# Altium PCB Sensor.PcbDoc
Units mil, origin at the board's own origin, x right, y up, seen from the top; angles counter-clockwise.
Board outline 1017.81 x 5829.89 mil, 4 copper layers (Top Layer, Signal Layer 1, Signal Layer 2, Bottom Layer), stack 30.635 mil thick; 75 components, 81 nets, 286 pads, 106 vias.
Unrouted connection lines stored in the file: 52.
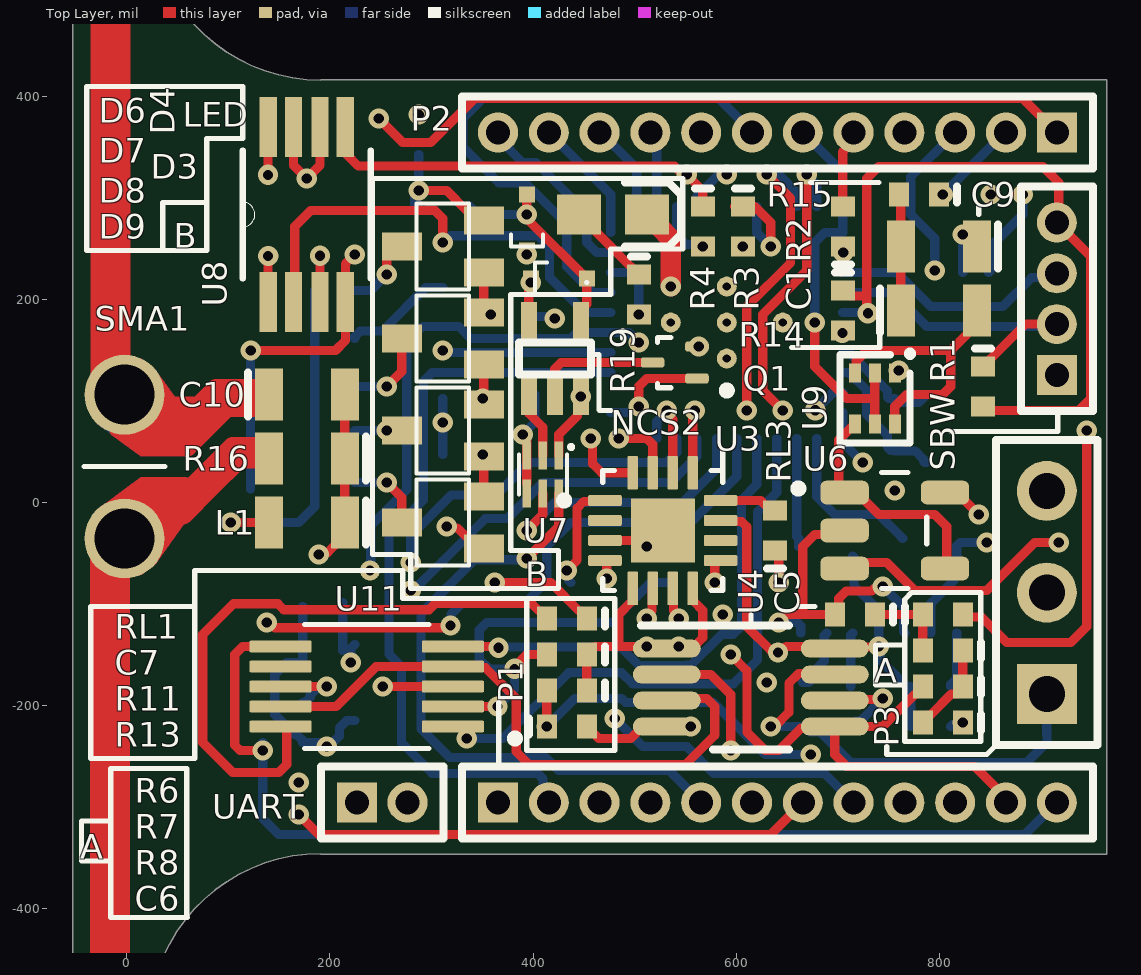
[diagram p0: Top Layer view]
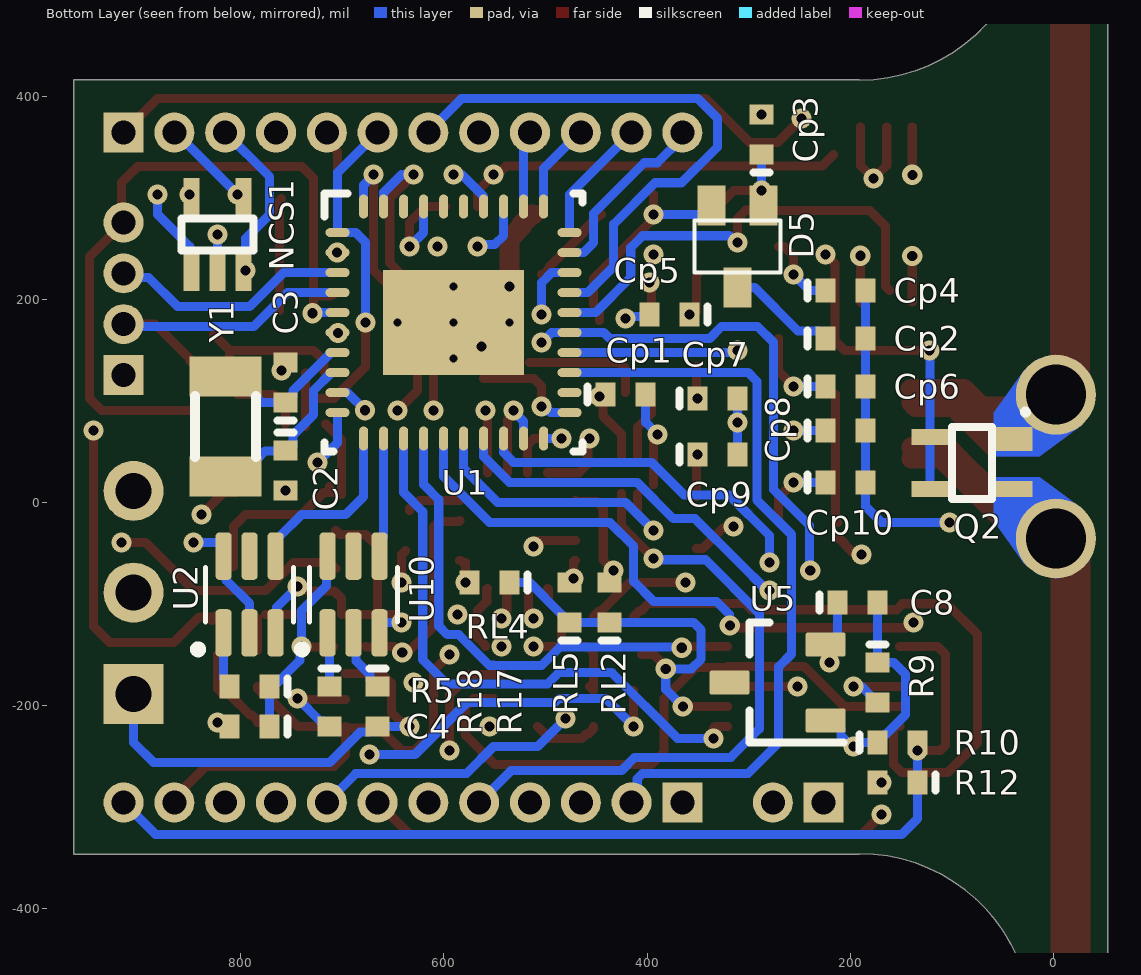
[diagram p1: Bottom Layer view, seen from below]
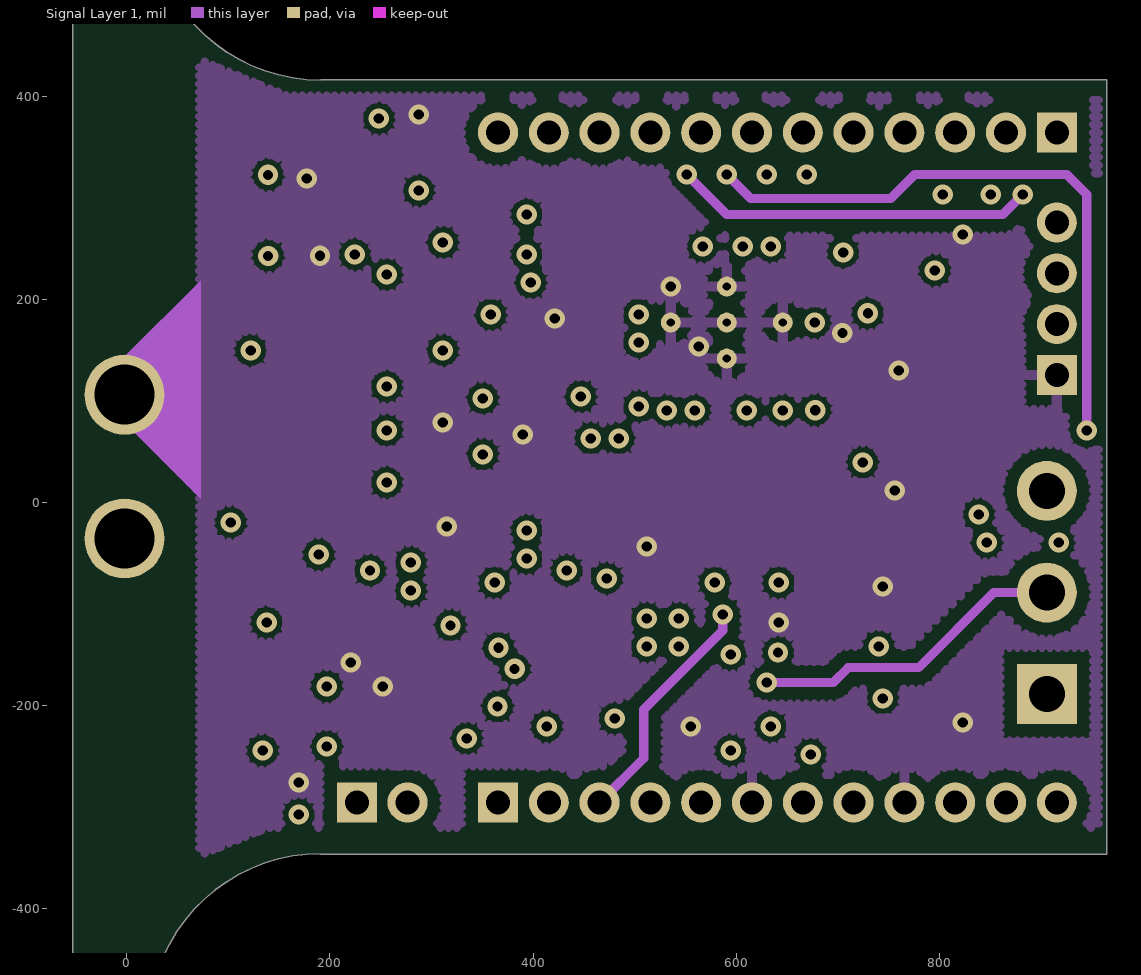
[diagram p2: Signal Layer 1]
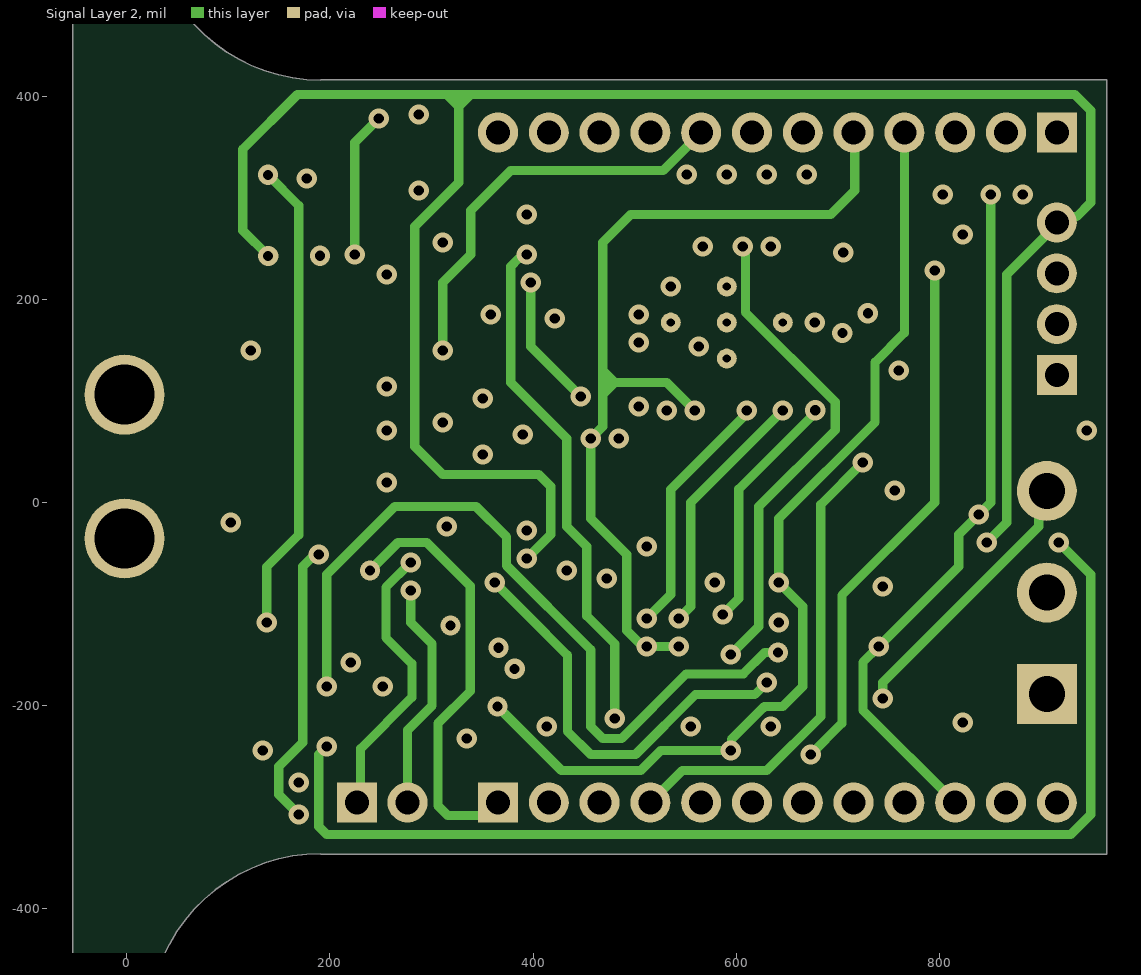
[diagram p3: Signal Layer 2]

## Layer stack, top to bottom
Top Solder: solder mask 0.4, Solder Resist, Dk 3.5
Top Layer: signal copper 1.4
Dielectric 1: core 10, FR-4, Dk 4.2
Signal Layer 1: signal copper 1.4173
Dielectric 3: prepreg 5, Dk 4.2
Signal Layer 2: signal copper 1.4173
Dielectric 2: core 10, Dk 4.2
Bottom Layer: signal copper 1.4
Bottom Solder: solder mask 0.4, Solder Resist, Dk 3.5

## Board outline
-53.24,-2839.94 -53.24,2910.06 cw(c-15.74,2912.56) 21.76,2910.06 21.76,585.06 ccw(c191.05,585.06) 191.05,415.77 191.05,416.06 964.57,416.06 964.57,-345.94 191.05,-345.94 191.05,-345.58 ccw(c191.05,-514.87) 21.76,-514.87 21.76,-2839.94 cw(c-15.74,-2842.44)

## Design rules (kind name [scope] priority, off if disabled: settings)
Clearance [All] p1: gap=4 ignorepadtopadclearanceinfootprint=FALSE except(5: Via-Fill Via-Poly Via-Region; 12: Arc-Fill Arc-Poly Arc-Region Track-Fill Track-Poly Track-Region SMDPad-Fill SMDPad-Poly SMDPad-Region THPad-Fill THPad-Poly THPad-Region Fill-Fill Fill-Poly Fill-Region Poly-Poly Poly-Region Region-Region)
PlaneClearance [All] p1: clearance=10
PlaneConnect [All] p1: planeconnectstyle=Direct reliefexpansion=20 reliefentries=4 reliefconductorwidth=10 reliefairgap=10
PolygonConnect [All] p1: thpad.connectstyle=Relief thpad.reliefconductorwidth=10 thpad.reliefentries=4 thpad.polygonreliefangle="90 Angle" thpad.airgapwidth=10 smdpad.connectstyle=Relief smdpad.reliefconductorwidth=10 smdpad.reliefentries=4 smdpad.polygonreliefangle="90 Angle" smdpad.airgapwidth=10 via.connectstyle=Direct via.reliefconductorwidth=10 via.reliefentries=4 via.polygonreliefangle="90 Angle" via.airgapwidth=10
RoomDefinition SS [InComponentClass('SS')] p1: confinementstyle=ConfineIn formatcopy=TRUE lockcomponents=FALSE outline -10547.24,-6763.94 -8547.24,-6763.94 -8547.24,-5763.94 -10547.24,-5763.94
RoomDefinition AFE [InComponentClass('AFE')] p2: confinementstyle=ConfineIn formatcopy=TRUE lockcomponents=FALSE outline -10547.24,-6763.94 -8547.24,-6763.94 -8547.24,-5763.94 -10547.24,-5763.94
RoutingVias [All] p1: holewidth=10 width=20 viastyle="Through Hole" minholewidth=10 minwidth=20 maxholewidth=10 maxwidth=20
SolderMaskExpansion [All] p1: expansion=4 istentingtop=FALSE
UnRoutedNet [All] p1: checkbadconnections=TRUE
Width [All] p1: maxlimit=1000 minlimit=9 preferedwidth=9
27 further rules are at their usual default settings.

## Classes and differential pairs
net class POWER: GND V1.25 VCC VREF+ VSENSOR
component class AFE: C10 Cp1 Cp2 Cp3 Cp4 Cp5 Cp6 Cp7 Cp8 Cp9 Cp10 D3 D4 D5 D6 D7 D8 D9 L1 NCS2 Q1 Q2 R16 SMA1 U7 U8
component class MCU: C1 C2 C3 LED P1 P2 R1 R2 R3 R4 R19 SBW U1 UART Y1
component class SS: C4 C5 C6 C7 C8 C9 NCS1 P3 R5 R6 R7 R8 R9 R10 R11 R12 R13 R14 R15 R17 R18 RL1 RL2 RL3 RL4 RL5 U2 U3 U4 U5 U6 U9 U10 U11

## Components (designator, comment, footprint, x,y, rotation, side; value= is the part's Value field where it differs from the comment)
C1 "" 0402 704.72,188.98 r270 top value=1uF
C2 "" 0402 755.91,31.5 r270 bottom value=12pF
C3 "" 0402 755.91,118.11 r90 bottom value=12pF
C4 "" 0402 791.34,-220.47 r0 bottom value=1uF
C5 "" 0402 716.54,-110.24 r180 top value=0.1uF
C6 "" 0402 803.15,-216.54 r180 top value=0.1uF
C7 "" 0402 433.07,-149.61 r180 top value=10uF
C8 "" 0402 192.91,-98.43 r180 bottom value=1uF
C9 "" 0805 799.21,251.97 r180 top value=1pF
C10 "" 0805 177.17,106.3 r0 top value=2.2pF
Cp1 "" 0402 421.26,106.3 r180 bottom value=0.1uF
Cp2 "" 0402 204.72,161.42 r180 bottom value=7pF
Cp3 "" 0402 287.4,362.2 r90 bottom value=10pF
Cp4 "" 0402 204.72,208.66 r180 bottom value=7pF
Cp5 "" 0402 377.95,185.04 r0 bottom value=10pF
Cp6 "" 0402 204.72,114.17 r180 bottom value=7pF
Cp7 "" 0402 330.71,102.36 r180 bottom value=10pF
Cp8 "" 0402 204.72,70.87 r180 bottom value=7pF
Cp9 "" 0402 330.71,47.24 r180 bottom value=10pF
Cp10 "" 0402 204.72,19.69 r180 bottom value=7pF
D3 "RB751S40T1" SOD-523 425.2,220.47 r90 top
D4 "RB751S40T1" SOD-523 393.7,275.59 r180 top
D5 "HSMS-285C" "SOT-323, HSMS-285C" 311.02,251.97 r0 bottom
D6 "HSMS-285C" "SOT-323, HSMS-285C" 311.02,251.97 r90 top
D7 "HSMS-285C" "SOT-323, HSMS-285C" 311.02,161.42 r90 top
D8 "HSMS-285C" "SOT-323, HSMS-285C" 311.02,70.87 r90 top
D9 "HSMS-285C" "SOT-323, HSMS-285C" 311.02,-19.69 r90 top
L1 "" 0805 177.17,-19.69 r180 top value=22nH
LED "RED LED" "Diode - 0603" 478.35,283.46 r180 top
NCS1 "NCS2200" SC70-5 822.83,263.78 r180 bottom
NCS2 "NCS2200" SC70-5 421.26,141.73 r0 top
P1 "不插排母，只留焊孔" MHDR1X12 365.35,-295.28 r0 top locked
P2 "不插排母，只留焊孔" MHDR1X12 915.35,364.17 r180 top locked
P3 "宽距90°特殊弯排母" HDR1X3 905.51,-188.58 r90 top locked
Q1 "NTK3134Ｎ" SOT40P120X55-3N 539.37,137.8 r180 top
Q2 "BF1101WR" SOT343R 78.74,39.37 r90 bottom
R1 "" 0402 842.52,114.17 r270 top value=47k
R2 "" 0402 704.72,271.65 r90 top value=0
R3 "" 0402 606.3,271.65 r270 top value=0
R4 "" 0402 566.93,271.65 r270 top value=0
R5 "" 0402 791.34,-181.1 r0 bottom value=0
R6 "" 0402 803.15,-110.24 r0 top value=1M
R7 "" 0402 803.15,-145.67 r180 top value=1M
R8 "" 0402 803.15,-181.1 r180 top value=0
R9 "" 0402 173.23,-177.17 r270 bottom value=510k
R10 "" 0402 153.54,-236.22 r180 bottom value=50k
R11 "" 0402 433.07,-185.04 r180 top value=1M
R12 "" 0402 153.54,-275.59 r0 bottom value=1.2M
R13 "" 0402 433.07,-220.47 r0 top value=1M
R14 "" 0805 799.21,188.98 r0 top value=300k
R15 "" 0402 779.53,303.15 r180 top value=0
R16 "" 0805 177.17,43.31 r180 top value=0
R17 "" 0402 665.35,-200.79 r270 bottom value=0
R18 "" 0402 712.6,-200.79 r270 bottom value=0
R19 "" 0402 503.94,204.72 r270 top value=100
RL1 "RT0402BRD0710RL" 0402 433.07,-114.17 r180 top value=10.0
RL2 "RT0402BRD07240RL" 0402 437.01,-98.43 r90 bottom value=10.0
RL3 "RT0402BRD072KL" 0402 637.8,-27.56 r90 top value=10.0
RL4 "RT0402BRD076K7L" 0402 555.12,-78.74 r0 bottom value=10.0
RL5 "RT0402BRD0748KL" 0402 476.38,-98.43 r90 bottom value=10.0
SBW "90°弯排母" MHDR1X4 915.35,125.59 r90 top locked
SMA1 "" "SMA - Hole - 2 Pin" -2.24,35.39 r180 top
U1 "MSP430FR2355TRHAR" MSP430FR2355TRHA_RHA0040E 590.55,177.17 r180 bottom
U2 "ADG841YKSZ-REEL7" SOT65P210X110-6N 791.34,-90.55 r90 bottom
U3 "ADG811YCPZ-REEL" QFN50P300X300X90-17N 527.56,-27.56 r0 top
U4 "LPV802DGKR" DGK0008A_N 614.17,-182.09 r0 top
U5 "REF1112AIDBZR" DBZ0003A_N 271.65,-177.17 r0 bottom
U6 "OPA313" SOT95P280X145-5N 755.91,-27.56 r0 top
U7 "NLSV1T244" UDFN6 409.45,27.56 r180 top
U8 "ADG918BRMZ" SOP65P490X110-8N 177.17,283.46 r90 top
U9 "SI1016X-T1-GE3" "SC-89-6 Vishay" 736.22,102.36 r270 top
U10 "ADG841YKSZ-REEL7" SOT65P210X110-6N 688.98,-90.55 r90 bottom
U11 "ADG811YRUZ" SOP50P490X110-10N 236.22,-181.1 r180 top
UART "MHDR1X2" MHDR1X2 226.38,-295.28 r0 top locked
Y1 "XTAL" "XTAL [3.20mm x 1.50mm]" 814.96,74.8 r270 bottom value=32.768kHz

## Footprints (in the part's own frame and the unit in brackets; to place one, negate y for a bottom-side part, rotate by r counter-clockwise, add the part's x,y. Pads: shape width x height; smd on the part's side, far side on the other; paste and mask are expansions set on the pad)
0402 [mm] "Surface Mount; Body 1 x 0.5 mm (LxW typ)"
  rect 0.5x0.6 smd: 1(-0.5,0) 2(0.5,0)
  silkscreen extent -0.95,-0.2 -0.95,0.2, body extent -0.5,-0.25 0.5,0.25, height 0.5
0805 [mm] "Surface Mount; Body 2.0 x 1.25 mm (LxW typ)"
  rect 0.7x1.3 smd: 1(-0.95,0) 2(0.95,0)
  silkscreen extent -1.48,-0.55 -1.48,0.55, body extent -1,-0.62 1,0.63, height 1.25
DBZ0003A_N [mm] "SOT23, 3-Leads, Body 2.9x1.3mm, Pitch 0.95mm, Lead Span 2.4mm, IPC Medium Density"
  rrect17% 1x0.6 smd: 1(-1.2,0.95) 2(-1.2,-0.95) 3(1.2,0)
  silkscreen extent -1.65,-1.5 0.7,1.5, body extent -1.26,-1.46 1.26,1.46, height 0.98
DGK0008A_N [mm] "TSOP, 8-Leads, Body 3x3mm, Pitch 0.65mm, IPC Medium Density"
  oval 1.7x0.45 smd: 1(-2.1,0.975) 2(-2.1,0.325) 3(-2.1,-0.325) 4(-2.1,-0.975) 5(2.1,-0.975) 6(2.1,-0.325) 7(2.1,0.325) 8(2.1,0.975)
  silkscreen extent -2.75,-1.55 0.95,1.55, body extent -2.45,-1.5 2.45,1.5, height 0.94
"Diode - 0603" [mm] "Diode: Body 1.6 x 0.8 mm (LxW typ)"
  rect 1.1x1 smd: 1(0.85,0) 2(-0.85,0)
  silkscreen extent -1.7,-0.8 -0.3,0.8
HDR1X3 [mm] "Connector; Header; 3 Position"
  rect 1.5x1.5 hole 0.9: 1(0,0)
  round 1.5 hole 0.9: 2(2.54,0) 3(5.08,0)
  silkscreen extent -1.27,-1.27 6.35,1.27, body extent -1.27,-1.27 6.35,1.27, height 10.1
MHDR1X2 [mm] "Connector; Header; 2 Position"
  rect 1x1 hole 0.6: 1(0,0)
  round 1 hole 0.6: 2(1.27,0)
  silkscreen extent -0.9,-0.9 2.17,0.9
MHDR1X4 [mm] "Connector; Header; 4 Position"
  rect 1x1 hole 0.6: 1(0,0)
  round 1 hole 0.6: 2(1.27,0) 3(2.54,0) 4(3.81,0)
  silkscreen extent -0.9,-0.9 4.71,0.9, body extent -1.27,-1.27 5.08,1.27, height 10.15
MHDR1X12 [mm] "Connector; Header; 12 Position"
  rect 1x1 hole 0.6: 1(0,0)
  round 1 hole 0.6: 2(1.27,0) 3(2.54,0) 4(3.81,0) 5(5.08,0) 6(6.35,0) 7(7.62,0) 8(8.89,0) 9(10.16,0) 10(11.43,0) 11(12.7,0) 12(13.97,0)
  silkscreen extent -0.9,-0.9 14.87,0.9, body extent -1.27,-1.27 15.24,1.27, height 10.15
MSP430FR2355TRHA_RHA0040E [mm]
  oval 0.6x0.23 smd paste+0 mask+0.076: 1(-2.9,2.25) 2(-2.9,1.75) 3(-2.9,1.25) 4(-2.9,0.75) 5(-2.9,0.25) 6(-2.9,-0.25) 7(-2.9,-0.75) 8(-2.9,-1.25) 9(-2.9,-1.75) 10(-2.9,-2.25) 21(2.9,-2.25) 22(2.9,-1.75) 23(2.9,-1.25) 24(2.9,-0.75) 25(2.9,-0.25) 26(2.9,0.25) 27(2.9,0.75) 28(2.9,1.25) 29(2.9,1.75) 30(2.9,2.25)
  oval 0.23x0.6 smd paste+0 mask+0.076: 11(-2.25,-2.9) 12(-1.75,-2.9) 13(-1.25,-2.9) 14(-0.75,-2.9) 15(-0.25,-2.9) 16(0.25,-2.9) 17(0.75,-2.9) 18(1.25,-2.9) 19(1.75,-2.9) 20(2.25,-2.9) 31(2.25,2.9) 32(1.75,2.9) 33(1.25,2.9) 34(0.75,2.9) 35(0.25,2.9) 36(-0.25,2.9) 37(-0.75,2.9) 38(-1.25,2.9) 39(-1.75,2.9) 40(-2.25,2.9)
  rect 3.52x2.62 smd paste-1.747 mask+0: 41(0,0)
  round 0.5 hole 0.203 mask+0: V(-1.4,0) V(0,-0.9) V(0,0) V(0,0.9) V(1.4,0)
  silkscreen extent -3.22,-3.22 3.22,3.22, body extent 0,0 0.25,0.25, height 0.25
QFN50P300X300X90-17N [mm]
  rrect25% 0.84x0.27 smd mask+0: 1(-1.445,0.75) 2(-1.445,0.25) 3(-1.445,-0.25) 4(-1.445,-0.75) 9(1.445,-0.75) 10(1.445,-0.25) 11(1.445,0.25) 12(1.445,0.75)
  rrect25% 0.27x0.84 smd mask+0: 5(-0.75,-1.445) 6(-0.25,-1.445) 7(0.25,-1.445) 8(0.75,-1.445) 13(0.75,1.445) 14(0.25,1.445) 15(-0.25,1.445) 16(-0.75,1.445)
  rect 1.6x1.6 smd paste-0.294 mask+0.05: 17(0,0)
  silkscreen extent -2.56,-1.5 1.5,1.5
SC70-5 [mm] "SC70-5"
  rect 0.4x0.92 smd: 1(-0.65,-0.95) 2(0,-0.95) 3(0.65,-0.95) 4(0.65,0.95) 5(-0.65,0.95)
  silkscreen extent -0.9,-0.4 0.9,0.4
"SC-89-6 Vishay" [mm]
  rect 0.478x0.3 smd: 1(-0.638,0.5) 2(-0.638,0) 3(-0.638,-0.5) 4(0.638,-0.5) 5(0.638,0) 6(0.638,0.5)
  silkscreen extent -1.15,-0.87 1.11,0.91
"SMA - Hole - 2 Pin" [mm] "SMA port for wisp"
  round 2 hole 1.5: 1(0,1.796) 2(0,-1.796)
  silkscreen extent -1.02,0 1.02,0
SOD-523 [mm] "SOD-523 Footprint"
  rect 0.4x0.4 smd: 1(0,0.7) 2(0,-0.7)
  silkscreen extent -0.4,0.3 0.4,0.6, body extent -0.4,-0.6 0.4,0.6, height 1
SOP50P490X110-10N [mm]
  rrect25% 1.55x0.3 smd: 1(-2.155,1) 2(-2.155,0.5) 3(-2.155,0) 4(-2.155,-0.5) 5(-2.155,-1) 6(2.155,-1) 7(2.155,-0.5) 8(2.155,0) 9(2.155,0.5) 10(2.155,1)
  silkscreen extent -3.8,-1.55 1.55,1.55
SOP65P490X110-8N [mil]
  rect 59x17 smd: 1(-86,38) 2(-86,13) 3(-86,-13) 4(-86,-38) 5(86,-38) 6(86,-13) 7(86,13) 8(86,38)
  silkscreen extent -63,-63 63,63
SOT40P120X55-3N [mm]
  rrect50% 0.59x0.25 smd: 1(-0.555,0.4) 2(-0.555,-0.4) 3(0.555,0)
  silkscreen extent -1.4,-0.63 0.43,0.8, body extent -0.6,-0.6 0.6,0.6, height 0.55
SOT65P210X110-6N [mm]
  rrect50% 1.19x0.4 smd: 1(-0.96,0.65) 2(-0.96,0) 3(-0.96,-0.65) 4(0.96,-0.65) 5(0.96,0) 6(0.96,0.65)
  silkscreen extent -1.47,-1.1 0.68,1.39
SOT95P280X145-5N [mm]
  rrect50% 1.21x0.59 smd: 1(-1.255,0.95) 2(-1.255,0) 3(-1.255,-0.95) 4(1.255,-0.95) 5(1.255,0.95)
  silkscreen extent -2.51,-1.45 0.8,1.45
SOT343R [mm] "SOT343R - Package for BF1101WR"
  rect 0.6x0.92 smd: 1(0.584,-1.016)
  rect 0.4x0.92 smd: 2(-0.664,-1.007) 3(-0.664,1.093) 3(0.636,1.093)
  silkscreen extent -0.91,-1.3 1.27,0.54
"SOT-323, HSMS-285C" [mm] "SOT-323/SC-70; 3 Leads; HSMS-285C"
  rect 0.7x1 smd: 1(-0.65,-1.025) 2(0.65,-1.025) 3(0,1.025)
  silkscreen extent -1.07,-0.65 1.07,0.65, body extent -1.07,-0.65 1.07,0.65, height 1
UDFN6 [mm] "UDFN6 - Level Shifter -  NLSV1T244"
  rect 0.22x0.7 smd: 1(-0.4,-0.477) 2(0,-0.477) 3(0.4,-0.477) 4(0.4,0.477) 5(0,0.477) 6(-0.4,0.477)
  silkscreen extent -0.76,-0.74 0.6,0.5
"XTAL [3.20mm x 1.50mm]" [mm] "FC-135   crystal - epson eletronics"
  rect 1x1.8 smd: 1(-1.25,0) 2(1.25,0)
  silkscreen extent -0.76,-0.76 0.76,0.76

## Part data
C1 C2 C3 C4 C5 C6 C7 C8 C9: library part Cap, "Ceramic Capacitor (Surface Mount)", Manufacturer="Generic Ceramic Chip Cap (TBD)"
C10: library part Cap, "Ceramic Capacitor (Surface Mount)", Digi-Key Part Number=712-1289-1-ND, Manufacturer=Johanson, Manufacturer Part Number=500R07S5R6CV4T
Cp1 Cp2 Cp3 Cp4 Cp5 Cp6 Cp7 Cp8 Cp9 Cp10: library part Cap, "Ceramic Capacitor (Surface Mount)", Digi-Key Part Number=712-1253-1-ND, Manufacturer=Johanson, Manufacturer Part Number=500R07S100JV4T
D3 D4: "Schottky Diode", Code_JEDEC=DO-214-AA, LatestRevisionDate=17-Jul-2002, LatestRevisionNote="Re-released for DXP Platform.", PackageReference=SMB, Published=8-Jun-2000, Publisher="Altium Limited"
D5 D6 D7 D8 D9: "Agilent Schottky Diode, Two in Series, Small Package SOT-323", Digi-Key Part Number=516-2558-ND, Manufacturer="Avago Technologies US Inc.", Manufacturer Part Number=HSMS-285C-BLKG
L1: library part Ind, "Inductor (Surface Mount)", Digi-Key Part Number=N/A, Manufacturer="Coilcraft (http://www.coilcraft.com/0402cs.cfm)", Manufacturer Part Number=0402CS-16NX_LU
LED: library part "Diode - LED", "Typical RED, GREEN, YELLOW, AMBER GaAs LED"
NCS1 NCS2: "Comparator: On Semi 10uA Comparator", Digi-Key Part Number=NCS2200SQ2T2GOSTR-ND, Manufacturer="ON Semiconductor", Manufacturer Part Number=NCS2200SQ2T2G
P1 P2: library part MHDR1X12, "Header, 12-Pin", LatestRevisionDate=17-Jul-2002, LatestRevisionNote="Re-released for DXP Platform.", Publisher="Altium Limited"
P3: library part "Header 3", "Header, 3-Pin", LatestRevisionDate=17-Jul-2002, LatestRevisionNote="Re-released for DXP Platform.", Publisher="Altium Limited"
Q2: "N-Channel Dual-Gate Mos-Fets MOSFET, SOT343R", Digi-Key Part Number=568-6140-1-ND, Manufacturer="NXP Semiconductors", Manufacturer Part Number=BF1101WR,115
R1 R2 R3 R4 R16 R19: library part Res, "Chip Resistor (Surface Mount)", Digi-Key Part Number=P47.0KLCT-ND, Manufacturer=Panasonic, Manufacturer Part Number=ERJ-2RKF4702X
R5 R6 R7 R8 R9 R10 R11 R12 R13 R14 R15 R17 R18: library part Res, "Chip Resistor (Surface Mount)", Manufacturer="Generic Chip Res (TBD)"
RL1: "RES, 10.0, 0.1%, 0.1 W, 0402", Manufacturer="Yageo America", PartNumber=RT0603BRD0710RL, Power_W=0.1, TempCo="25 ppm/C", Value1=0.1%, Value2=0.1W, Value_Code=10R0, ValueDisplayed=10.0, AEC Category=Q200, AEC Qualified=?, ComponentLink1Description="Datasheet link", ComponentLink1URL=http://www.yageo.com/pdf/PYu-RT_1-to-0.05_RoHS_L_3.pdf, CompType=Resistor, EIA_Code=E192, LatestRevisionDate=2016-06-02, MountType=SMT, PackageReference=0603, Published=2008-06-26, Publisher="Texas Instruments", Res_ohm=10, RoHS=Y, SizeArea_mm2=1.28, SizeX_mm=1.6, SizeY_mm=0.8, SizeZ_mm=1, SymbolVersion=2009-05-29, Technology="Thin Film", Tolerance_%=0.1, U/M=EA, VDC_V=75
RL2: "RES, 240, 0.1%, 0.1 W, 0402", Manufacturer="Yageo America", PartNumber=RT0603BRD0710RL, Power_W=0.1, TempCo="25 ppm/C", Value1=0.1%, Value2=0.1W, Value_Code=10R0, ValueDisplayed=240, AEC Category=Q200, AEC Qualified=?, ComponentLink1Description="Datasheet link", ComponentLink1URL=http://www.yageo.com/pdf/PYu-RT_1-to-0.05_RoHS_L_3.pdf, CompType=Resistor, EIA_Code=E192, LatestRevisionDate=2016-06-02, MountType=SMT, PackageReference=0603, Published=2008-06-26, Publisher="Texas Instruments", Res_ohm=10, RoHS=Y, SizeArea_mm2=1.28, SizeX_mm=1.6, SizeY_mm=0.8, SizeZ_mm=1, SymbolVersion=2009-05-29, Technology="Thin Film", Tolerance_%=0.1, U/M=EA, VDC_V=75
RL3: "RES, 2k, 0.1%, 0.1 W, 0402", Manufacturer="Yageo America", PartNumber=RT0603BRD0710RL, Power_W=0.1, TempCo="25 ppm/C", Value1=0.1%, Value2=0.1W, Value_Code=10R0, ValueDisplayed=2k, AEC Category=Q200, AEC Qualified=?, ComponentLink1Description="Datasheet link", ComponentLink1URL=http://www.yageo.com/pdf/PYu-RT_1-to-0.05_RoHS_L_3.pdf, CompType=Resistor, EIA_Code=E192, LatestRevisionDate=2016-06-02, MountType=SMT, PackageReference=0603, Published=2008-06-26, Publisher="Texas Instruments", Res_ohm=10, RoHS=Y, SizeArea_mm2=1.28, SizeX_mm=1.6, SizeY_mm=0.8, SizeZ_mm=1, SymbolVersion=2009-05-29, Technology="Thin Film", Tolerance_%=0.1, U/M=EA, VDC_V=75
RL4: "RES, 6.7, 0.1%, 0.1 W, 0402", Manufacturer="Yageo America", PartNumber=RT0603BRD0710RL, Power_W=0.1, TempCo="25 ppm/C", Value1=0.1%, Value2=0.1W, Value_Code=10R0, ValueDisplayed=6.7k, AEC Category=Q200, AEC Qualified=?, ComponentLink1Description="Datasheet link", ComponentLink1URL=http://www.yageo.com/pdf/PYu-RT_1-to-0.05_RoHS_L_3.pdf, CompType=Resistor, EIA_Code=E192, LatestRevisionDate=2016-06-02, MountType=SMT, PackageReference=0603, Published=2008-06-26, Publisher="Texas Instruments", Res_ohm=10, RoHS=Y, SizeArea_mm2=1.28, SizeX_mm=1.6, SizeY_mm=0.8, SizeZ_mm=1, SymbolVersion=2009-05-29, Technology="Thin Film", Tolerance_%=0.1, U/M=EA, VDC_V=75
RL5: "RES, 48k, 0.1%, 0.1 W, 0402", Manufacturer="Yageo America", PartNumber=RT0603BRD0710RL, Power_W=0.1, TempCo="25 ppm/C", Value1=0.1%, Value2=0.1W, Value_Code=10R0, ValueDisplayed=48k, AEC Category=Q200, AEC Qualified=?, ComponentLink1Description="Datasheet link", ComponentLink1URL=http://www.yageo.com/pdf/PYu-RT_1-to-0.05_RoHS_L_3.pdf, CompType=Resistor, EIA_Code=E192, LatestRevisionDate=2016-06-02, MountType=SMT, PackageReference=0603, Published=2008-06-26, Publisher="Texas Instruments", Res_ohm=10, RoHS=Y, SizeArea_mm2=1.28, SizeX_mm=1.6, SizeY_mm=0.8, SizeZ_mm=1, SymbolVersion=2009-05-29, Technology="Thin Film", Tolerance_%=0.1, U/M=EA, VDC_V=75
SBW: library part MHDR1X4, "Header, 4-Pin", Digi-Key Part Number=ED90474-ND, Manufacturer="Mill-Max Manufacturing", Manufacturer Part Number=851-43-004-20-001000
SMA1: library part "SMA - Hole - 2 Pin", "Two pin SMA connector wisp", DNP=DNP, Note="This part is used to attach the antennae to WISP in the layout"
U1: "24MHz 105C integrated analog microcontroller with 32KB FRAM, Op-Amps/PGAs, 12-bit DACs, 12-bit ADC", Mfr_Name="Texas Instruments", Copyright="Copyright (C) 2022 Ultra Librarian. All rights reserved.", Manufacturer_Part_Number=MSP430FR2355TRHAR, RefDes=RefDes, Type=DEV
U2 U10: "单通道单刀单掷开关"
U3: "四通道单刀单掷开关"
U4: "350 nA Rail-to-Rail I/O Nanopower Operational Amplifier Family, DGK0008A", Alternate Manufacturer="Texas Instruments", Alternate PartNumber=LPV802DGKT, ComponentLink1Description="Datasheet Link", ComponentLink1URL=https://sps06.itg.ti.com/sites/KMS/crossdivteams/altium/docs/ComponentDatasheets/LPV80x_Prelim_20150508-1515_PPR.pdf, CompType=IC, LatestRevisionDate=2016-06-15, Manufacturer="Texas Instruments", MountType=SMT, PackageDescription=VSSOP-8, PackageReference=DGK0008A, PartNumber=LPV802DGKR, Publisher="Texas Instruments", SizeArea_mm2=15.655, SizeAreaWB_mm2=35.955, SizeX_mm=5.05, SizeY_mm=3.1, SizeZ_mm=1.1, SymbolVersion=2013-12-03, U/M=EA
U5: "1 uA Shunt Voltage Reference, 1.25 V, 10 ppm / degC, 5 mA, -40 to 85 degC, 3-pin SOT-23 (DBZ), Green (RoHS & no Sb/Br)", Alternate Manufacturer="Texas Instruments", Alternate PartNumber=Equivalent, Rating=Catalog, Supplier Part Number 1=REF1112AIDBZR-ND, Temp Coeff(Max)(ppm/ degree C)=50, Temp Coeff(Typ)(ppm/ degree C)=10, Code_JEDEC=TO-236, ComponentLink1Description="Manufacturer URL", ComponentLink1URL=http://www.ti.com/, ComponentLink2Description=Datasheet, ComponentLink2URL=http://www.ti.com/general/docs/lit/getliterature.tsp?genericPartNumber=REF1112&fileType=pdf, ComponentLink3Description="Package Specification", ComponentLink3URL=http://www.ti.com/litv/pdf/mpds108a, ComponentLink4Description="URL Link1", ComponentLink4URL="Samples URL:http://www.ti.com/product/ref1112", DatasheetVersion=SBOS283C, Eco-Plan="Green (RoHS & no Sb/Br)", Initial Accuracy @ 25/deg C(%)=0.2, Iout/Iz(Max)(mA)=5, Manufacturer="Texas Instruments", Min Iz for Regulation(uA)=1.2, MountType=SMT, PackageDescription="3-Pin Plastic Small Outline, Body 2.92 x 1.3 mm, Pitch 0.95 mm", PackageReference=DBZ0003A, PackageVersion=4203227/B, PartNumber=REF1112AIDBZR, SubFamily="Shunt Voltage Reference", Supplier 1=Digi-Key, Supplier 2=Newark, Supplier 3=Mouser, Supplier Part Number 2=87H2545, Supplier Part Number 3=595-REF1112AIDBZR, VO(V)=1.25
U6: "低功耗运算放大器"
U7: "Level Shifter: 1-Bit Dual-Supply Non-Inverting Level Translator", Digi-Key Part Number=NLSV1T244MUTBG-ND, Manufacturer="ON Semiconductor", Manufacturer Part Number=NLSV1T244MUTBG
U8: "RF Switch Single Pole 0 MHz to 4GHz 34dB 8-Pin MSOP", Package="MSOP-8 Analog Devices", Digi-Key_Part_Number=ADG918BRMZ-ND, Digi-Key_Purchase_URL=https://www.digikey.ru/product-detail/en/analog-devices-inc/ADG918BRMZ/ADG918BRMZ-ND/820128?utm_source=snapeda&utm_medium=aggregator&utm_campaign=symbol, MF="Analog Devices", MP=ADG918BRMZ, SnapEDA_Link=https://www.snapeda.com/parts/ADG918BRMZ/Analog%20Devices%20Inc./view-part/239205/?ref=snap
U9: "N/P沟道增强型MOS管"
U11: library part ADG836YRMZ, "双通道单刀双掷开关"
UART: "Header, 2-Pin", LatestRevisionDate=17-Jul-2002, LatestRevisionNote="Re-released for DXP Platform.", Publisher="Altium Limited"
Y1: library part "XTAL 2-pins", "Crystal Oscillator - [3.20mm x 1.50mm]", Digi-Key Part Number="example: SE2413CT-ND", Manufacturer="Epson Toyocom Corporation", Manufacturer Part Number="FC-135 32.7680KA-A3"

## Via types
v1: diameter 20, hole 10, Top Layer to Bottom Layer, tented both sides, 106 vias

## Nets (pads, with @x,y where several pads share a name; then routed paths per layer and width w, separated by ;. In a path a pad name is that pad's centre, name@x,y a point inside that pad or via, vN(x,y) a via of type N, cw(c..) or ccw(c..) an arc to the next point about the centre after c; other vN are vias at no path point)
CE: P3.1 R17.2 U4.7 | length 435.4
  Top Layer w9: v1(633.86,-220.47) 637.8,-220.47 651.73,-206.54 651.73,-177.94 661.36,-168.31 U4.7@696.85,-168.31
  Bottom Layer w9: v1(633.86,-220.47) R17.2@661.42,-220.47 ; R17.2 667.32,-220.47 672.67,-225.81 682.51,-225.81 712.6,-255.91 885.83,-255.91 905.72,-236.01 905.72,-228.56 905.51,-228.35 P3.1@905.51,-192.91
CMP1_0: P1.3 U1.9 | length 508.3
  Signal Layer 1 w9: P1.3 508.89,-251.74 508.89,-203.71 586.61,-125.98 v1(586.61,-110.24)
  Signal Layer 2 w9: v1(586.61,-110.24) 602.36,-94.49 602.36,13.21 677.67,88.52 v1(677.67,90.78)
  Bottom Layer w9: v1(677.67,90.78) 695.15,108.26 U1.9
CMP1_1: P1.4 U1.10 | length 527.3
  Signal Layer 2 w9: P1.4 546.85,-263.78 629.92,-263.78 683.04,-210.67 683.04,-2 v1(724.41,39.37)
  Bottom Layer w9: U1.10 704.72,59.06 v1(724.41,39.37)
CMP1_O: P1.2 U1.23 | length 742.6
  Bottom Layer w9: P1.2 409.75,-289.67 409.75,-271.95 404.44,-266.64 300.62,-266.64 270.59,-236.61 270.59,-161.7 257.96,-149.08 257.96,-31.49 292,2.54 292,119.29 300.67,127.95 U1.23
GND: C1.2 C2.2 C3.2 C4.2 C5.2 C6.1 C8.1 C9.1 C10.1 Cp1.2 Cp3.2 Cp5.2 Cp7.2 Cp9.2 D9.1 LED.2 NCS1.2 P1.6 P1.9 Q1.2 Q2.1 R12.2 R13.2 SBW.1 SMA1.2 U1.6 U1.41 U1.V U2.3 U3.3 U3.17 U4.4 U5.2 U6.2 U7.3 U7.4 U8.3 U8.6 U8.7 U9.1 U10.3 U11.3 | length 1488.9
  Top Layer w9: U8.7 164.17,331.9 v1(177.17,318.9) 190.17,331.9 U8.6 ; U8.3@188.98,196.28 U8.3 v1(190.17,242.91) ; v1(251.97,-181.1) U11.3 ; v1(314.96,-23.62) 316.28,-24.95 325.14,-24.95 345.47,-45.28 D9.1 ; v1(389.76,66.93) 389.76,63.95 393.7,60.02 U7.3 U7.4@393.7,18.04 ; R13.2 452.76,-222.44 458.1,-227.78 460.07,-227.78 464.57,-232.28 496.06,-232.28 U4.4@507.87,-220.47 ; U3.3 509.84,-37.4 U3.17@511.81,-39.37 ; v1(641.73,-118.11) 640.69,-118.11 648.57,-110.24 665.35,-110.24 ; C5.2 665.35,-110.24 ; C5.2@700.79,-110.24 700.79,-94.49 708.21,-87.07 733.32,-87.07 735.61,-84.78 741.99,-84.78 v1(744.09,-82.68) ; U6.2 702.63,-31.42 677.24,-31.42 665.35,-43.31 665.35,-110.24
  Top Layer w20: SMA1.2 8.99,94.86 32.41,94.86 32.98,94.28 70.66,94.28 ; 31.5,74.8 71.29,74.8 75.12,70.98 ; 39.37,86.61 90.76,86.61 ; 39.6,55.34 59.48,55.34 75.12,70.98 ; C10.1 139.76,98.06 135.98,94.28 98.43,94.28 ; C10.1@140.71,111.72 88.09,111.72 70.66,94.28 ; LED.2 513.78,283.46 523.46,273.78 523.46,271.81 535.43,259.84 v1(535.43,212.6) ; 70.66,94.28 98.43,94.28 ; 75.12,70.98 90.76,86.61 ; 90.76,86.61 98.43,94.28
  Bottom Layer w9: U5.2@212.6,-145.67 C8.1 ; v1(220.47,-157.48) 220.47,-143.7 U5.2 ; Cp9.2 v1(311.02,78.74) Cp7.2 ; v1(389.76,66.93) 389.76,67.19 401.57,79 Cp1.2 ; Cp5.2@393.7,181.1 395.67,183.07 419.29,183.07 v1(421.26,181.1) ; v1(641.73,-118.11) 660.01,-118.11 663.39,-121.48 U10.3 ; v1(744.09,-82.68) 764.58,-103.16 764.58,-127.18 U2.3 ; C4.2 812.99,-218.5 820.87,-218.5 v1(822.83,-216.54) ; NCS1.2 v1(822.83,263.78)
  other v1: 169.29,-275.59 555.12,-220.47 511.81,-43.31 755.91,11.81 759.84,129.92 562.99,153.54 704.39,166.89 287.4,381.89
IV+: U4.3 U11.4 U11.9 | length 583.2
  Top Layer w9: U11.9 206.12,-200.79 245.49,-161.42 U11.4@318.9,-161.42 ; U11.4 322.12,-162.47 352.93,-162.47 383.38,-192.92 383.38,-245.14 396.24,-258 549.82,-258 578.74,-229.09 578.74,-200.79 570.87,-192.91 U4.3@551.18,-192.91
IV-: C7.2 P2.4 RL2.1 RL3.1 RL4.1 RL5.1 U4.2 U11.2 | length 1516.1
  Top Layer w9: U11.2 v1(364.88,-200.79) ; v1(381.76,-163.75) 381.76,-161.55 393.7,-149.61 C7.2@405.51,-149.61 ; U4.2@543.31,-169.29 574.8,-169.29 594.49,-188.98 v1(594.49,-244.09) ; RL3.1 641.73,-51.18 v1(641.73,-78.74)
  Signal Layer 2 w9: v1(364.88,-200.79) 427.87,-263.78 505.94,-263.78 525.63,-244.09 v1(594.49,-244.09) 595.21,-243.37 595.21,-232.95 626.2,-201.97 626.55,-201.97 627.74,-200.79 645.67,-200.79 665.35,-181.1 665.35,-102.36 v1(641.73,-78.74) 641.73,-15.75 736.57,79.09 736.57,138.14 765.35,166.93 P2.4 ; v1(381.76,-163.75) v1@381.89,-163.88
  Bottom Layer w9: v1(364.88,-200.79) 381.76,-183.9 v1(381.76,-163.75) 356.56,-163.75 346.94,-154.13 346.94,-125.5 354.33,-118.11 RL2.1 RL5.1 478.35,-118.11 483.69,-112.77 483.69,-110.8 515.75,-78.74 RL4.1
LED: R19.2 U1.28 | length 63.1
  Bottom Layer w9: U1.28 494.02,226.38 503.94,216.46 v1(503.94,185.04)
NetC5_1: C5.1 R6.1 R7.2 | length 70.9
  Top Layer w9: C5.1 R6.1@775.59,-110.24 ; R7.2 R6.1@783.46,-114.17
NetC6_2: C6.2 R7.1 R8.1 | length 93.4
  Top Layer w9: C6.2 783.46,-214.57 788.81,-209.22 790.78,-209.22 811.59,-188.41 817.49,-188.41 822.83,-183.07 R8.1 822.83,-149.61 R7.1@818.9,-145.67
NetC9_2: C9.2 R14.1 R15.2 | length 111.1
  Top Layer w9: R15.2@759.84,299.21 761.81,297.24 C9.2 R14.1
NetC10_2: C10.2 L1.1 P1.7 R16.1 | length 957.4
  Top Layer w9: v1(169.29,-307.09) 188.98,-326.77 633.86,-326.77 P1.7 ; v1(188.98,-51.18) 191.08,-49.08 197.92,-49.08 205.29,-41.71 205.29,-40.78 210.63,-35.43 L1.1@212.6,-35.43 ; L1.1@212.6,-19.68 214.57,-17.72 R16.1 C10.2
  Signal Layer 2 w9: v1(169.29,-307.09) 149.61,-287.4 149.61,-259.84 173.23,-236.22 173.23,-62.99 185.04,-51.18 v1(188.98,-51.18)
NetCp1_1: Cp1.1 D3.1 NCS2.3 NCS2.5 U7.1 | length 246.6
  Top Layer w9: NCS2.5 D3.1@395.67,214.3 ; v1(397.64,216.54) D3.1 ; D3.1@397.64,217.1 398.49,217.1 398.49,213.45 400.72,213.45 D3.1@401.57,214.3 ; U7.1 425.2,66.93 443.48,85.21 443.48,100.96 v1(446.85,104.33)
  Signal Layer 2 w9: v1(397.64,216.54) 397.64,153.54 v1(446.85,104.33)
NetCp2_1: Cp2.1 D5.3 | length 108.6
  Bottom Layer w9: Cp2.1 224.41,163.39 229.75,168.73 251.41,168.73 294.29,211.61 D5.3
NetCp2_2: Cp2.2 Cp4.2 Cp6.2 Cp8.2 Cp10.2 L1.2 | length 339.2
  Top Layer w9: v1(102.36,-19.68) L1.2
  Bottom Layer w9: v1(102.36,-19.68) 169.29,-19.68 185.04,-3.94 Cp10.2 Cp8.2 Cp6.2 Cp2.2 Cp4.2
NetCp3_1: Cp3.1 D5.1 D6.2 | length 135.5
  Top Layer w9: v1(287.4,307.09) 314.96,307.09 335.21,286.84 336.19,286.84 342.52,280.51 D6.2@342.52,279.53
  Bottom Layer w9: D5.1@283.46,291.34 283.46,303.15 v1(287.4,307.09) ; D5.1 285.43,310.2 287.4,312.17 Cp3.1
NetCp4_1: Cp4.1 D6.3 | length 74.9
  Top Layer w9: v1(255.91,224.41) 255.91,242.69 265.19,251.97 D6.3
  Bottom Layer w9: Cp4.1 240.16,208.66 v1(255.91,224.41)
NetCp5_1: Cp5.1 D6.1 D7.2 | length 37.8
  Top Layer w9: D6.1@350.39,224.41 351.38,223.43 D7.2
  other v1: 358.27,185.04
NetCp6_1: Cp6.1 D7.3 | length 84.9
  Top Layer w9: v1(255.91,114.17) 270.67,128.94 D7.3
  Bottom Layer w9: Cp6.1 v1(255.91,114.17)
NetCp7_1: Cp7.1 D7.1 D8.2 | length 37.8
  Top Layer w9: v1(350.39,102.36) 350.39,97.44 D8.2 ; D8.2@351.38,102.36 D7.1@351.38,133.86
NetCp8_1: Cp8.1 D8.3 | length 31.5
  Bottom Layer w9: Cp8.1 v1(255.91,70.87)
NetCp9_1: Cp9.1 D8.1 D9.2 | length 32.5
  Top Layer w9: D9.2 D8.1@351.38,38.39
  other v1: 350.39,47.24
NetCp10_1: Cp10.1 D9.3 | length 77
  Top Layer w9: v1(255.91,19.69) 270.67,4.92 D9.3
  Bottom Layer w9: Cp10.1 v1(255.91,19.69)
NetD3_2: D3.2 D4.2 D5.2 NCS2.4 | length 211.7
  Top Layer w9: D4.2 v1(393.7,283.46) 395.81,281.36 395.81,277.42 D3.2 452.76,195.28 446.85,189.37 NCS2.4
  Bottom Layer w9: D5.2 345.47,283.46 v1(393.7,283.46)
NetD4_1: D4.1 P1.8 | length 777.2
  Signal Layer 2 w9: v1(393.7,244.09) 390.72,244.09 386.94,240.31 385.98,240.31 377.95,232.28 377.95,118.11 433.07,62.99 433.07,-23.62 452.76,-43.31 452.76,-111.56 480.32,-139.12 v1(480.32,-212.6)
  Bottom Layer w9: v1(480.32,-212.6) 507.87,-240.16 551.26,-240.16 577.94,-266.84 686.91,-266.84 P1.8
NetLED_1: LED.1 R19.1 | length 85.8
  Top Layer w9: LED.1 446.85,283.46 462.04,268.28 462.04,266.31 496.63,231.72 496.63,229.75 501.97,224.41 R19.1
NetNCS1_1: NCS1.1 R4.1 U8.5 | length 826.6
  Top Layer w9: U8.5@216.54,342.52 227.95,331.11 538.97,331.11 543.46,326.62 544.42,326.62 548.2,322.83 v1(551.18,322.83) 551.18,322.57 566.93,306.82 R4.1
  Signal Layer 1 w9: v1(551.18,322.83) 590.55,283.46 862.2,283.46 v1(881.89,303.15)
  Bottom Layer w9: NCS1.1 850.15,228.1 850.15,251.73 881.89,283.46 v1(881.89,303.15)
NetNCS1_4: NCS1.4 P2.2 R15.1 | length 90.2
  Bottom Layer w9: NCS1.4 799.21,303.15 v1(803.15,303.15) P2.2@862.2,362.2
NetNCS2_1: NCS2.1 U7.2 | length 67.6
  Top Layer w9: NCS2.1@395.67,108.27 395.67,87.94 409.45,74.16 U7.2
NetNCS2_2: NCS2.2 Q1.3 | length 120.3
  Top Layer w9: NCS2.2@421.26,108.27 421.26,131.48 427.58,137.8 Q1.3@515.75,137.8
NetP1_11: P1.11 R3.2 R8.2 U4.5 | length 973.2
  Top Layer w9: v1(594.49,-149.61) 610.42,-165.54 610.42,-225.9 628.61,-244.09 641.73,-244.09 663.69,-222.14 695.18,-222.14 U4.5 696.85,-248.03 708.66,-259.84 834.65,-259.84 P1.11@870.08,-295.28 ; U4.5@716.54,-220.47 744.09,-220.47 776.15,-188.41 778.12,-188.41 783.46,-183.07 R8.2
  Signal Layer 2 w9: v1(594.49,-149.61) 622.05,-122.05 622.05,-3.94 697.29,71.31 697.29,98.92 608.89,187.32 608.89,243.83 608.4,244.32 608.4,249.86 v1(606.3,251.97)
NetP2_1: P2.1 Q2.3 U8.4 | length 1174.8
  Top Layer w9: v1(122.05,149.61) 205.45,149.61 215.17,159.32 215.17,234.85 v1(224.41,244.09) ; v1(248.03,377.95) 271.65,354.33 299.21,354.33 342.52,397.64 881.89,397.64 P2.1
  Signal Layer 2 w9: v1(224.41,244.09) 224.41,354.33 v1(248.03,377.95)
  Bottom Layer w9: Q2.3@121.76,13.23 121.76,64.41 121.76,149.32 v1(122.05,149.61)
NetQ1_1: Q1.1 U1.21 | length 110.2
  Top Layer w9: v1(503.94,94.49) 503.94,114.17 511.81,122.05 Q1.1
  Bottom Layer w9: U1.21 495.05,88.58 500.96,94.49 v1(503.94,94.49)
NetQ2_2: Q2.2 R16.2 SMA1.1 | length 274.3
  Top Layer w20: 31.5,-11.81 55.12,-11.81 81.79,14.86 ; 47.66,14.86 64.72,14.86 ; R16.2 110.24,43.31 ; R16.2@139.77,53.64 139.77,54.26 104.13,54.26 93.17,43.31 ; 64.72,14.86 81.79,14.86 ; 64.72,14.86 93.17,43.31 ; 81.79,14.86 110.24,43.31 ; 93.17,43.31 110.24,43.31
NetR2_1: R2.1 U1.2
  other v1: 705.14,246.11
NetR3_1: R3.1 U1.37 | length 110.7
  Top Layer w9: R3.1@598.43,291.34 618.11,291.34 633.86,275.59 v1(633.86,251.97)
  Bottom Layer w9: U1.37 620.08,265.75 v1(633.86,251.97)
NetR4_2: R4.2 U1.33 | length 58.7
  Bottom Layer w9: U1.33 541.34,262.74 550.01,254.07 564.82,254.07 v1(566.93,251.97)
NetR5_2: R5.2 U2.1 | length 55.2
  Bottom Layer w9: R5.2 811.02,-179.13 816.93,-173.23 U2.1
NetR6_2: R6.2 U1.34 | length 1003.7
  Top Layer w9: R6.2@828.18,-116.19 822.83,-110.85 R6.2 825.16,-112.56 840.91,-112.56 866.14,-137.8 929.13,-137.8 944.88,-122.05 v1(944.88,70.87)
  Signal Layer 1 w9: v1(590.55,322.83) 614.17,299.21 751.97,299.21 775.59,322.83 925.2,322.83 944.88,303.15 v1(944.88,70.87)
  Bottom Layer w9: U1.34 561.02,301.18 582.68,322.83 v1(590.55,322.83)
NetR14_2: R14.2 U9.3 U9.6 | length 247.9
  Top Layer w9: U9.3 717.94,128.89 717.94,139.2 728.35,149.61 811.02,149.61 ; U9.6 755.91,94.49 767.72,106.3 803.15,106.3 811.02,114.17 811.02,149.61 ; R14.2@826.77,165.35 811.02,149.61
NetR17_1: R17.1 U10.2 | length 62.1
  Bottom Layer w9: R17.1@665.35,-177.17 671.26,-177.17 672.67,-175.76 672.67,-169.85 686.53,-155.99 686.53,-130.79 U10.2
NetR18_1: R18.1 U10.1 | length 53.6
  Bottom Layer w9: R18.1 712.6,-130.32 U10.1
NetU1_11: U1.11 U2.4 | length 159
  Bottom Layer w9: U1.11 679.13,5.91 696.85,-11.81 740.16,-11.81 762.18,-33.83 762.37,-33.83 763.78,-35.24 U2.4@763.78,-35.43
NetU1_12: U1.12 U10.4 | length 107.1
  Bottom Layer w9: U1.12 659.45,-33.27 661.42,-35.24 U10.4@661.42,-43.31
NetU1_13: U1.13 U11.1 | length 577.6
  Top Layer w9: U11.1 333.24,-220.47 334.65,-221.88 v1(334.65,-232.28)
  Bottom Layer w9: v1(334.65,-232.28) 334.77,-232.16 370.2,-232.16 434.9,-167.46 486.99,-167.46 497.98,-178.45 597.14,-178.45 620.89,-154.7 620.89,-9.03 639.76,9.84 U1.13
NetU1_14: U1.14 U11.5 | length 499
  Top Layer w9: U11.5 364.72,-141.73 v1(365.92,-142.94)
  Bottom Layer w9: v1(365.92,-142.94) 366.57,-142.29 486.03,-142.29 503.96,-160.21 504.13,-160.21 ; 504.15,-160.23 550.97,-160.23 ; 550.99,-160.21 555.27,-160.21 585.41,-130.06 596.63,-130.06 605.19,-121.5 605.19,2.82 620.08,17.72 U1.14
NetU1_15: U1.15 U8.8 | length 1103.4
  Top Layer w9: v1(137.8,-118.11) 140.77,-118.11 145.9,-123.24 313.44,-123.24 315.63,-121.05 v1(318.61,-121.05) ; v1(139,322.5) 139.17,322.66 U8.8
  Signal Layer 2 w9: v1(137.8,-118.11) 137.8,-63.31 169.29,-31.82 169.29,292.21 v1(139,322.5)
  Bottom Layer w9: v1(318.61,-121.05) 319.1,-120.56 319.1,-110.04 331.89,-97.24 393.73,-97.24 413.39,-77.58 413.39,-43.03 436.73,-19.68 555.12,-19.68 600.39,25.59 U1.15
NetU1_16: U1.16 U7.5 | length 284.7
  Top Layer w9: v1(393.7,-27.56) 409.45,-11.81 U7.5
  Bottom Layer w9: v1(393.7,-27.56) 421.26,0 547.24,0 580.71,33.46 U1.16
NetU1_19: U1.19 U3.14 | length 95.3
  Top Layer w9: v1(531.5,90.55) 531.5,87.57 537.4,81.67 U3.14
  Bottom Layer w9: U1.19 521.65,79.78 531.5,89.62 v1(531.5,90.55)
NetU1_20: U1.20 U3.15 | length 81.4
  Top Layer w9: v1(484.25,62.99) 511.81,62.99 517.72,57.09 U3.15
  Bottom Layer w9: v1(484.25,62.99) U1.20
NetU1_26: U1.26 U8.2 | length 460.5
  Top Layer w9: U8.2@161.42,208.66 165.35,212.6 165.35,271.65 181.1,287.4 295.28,287.4 295.48,287.61 302.94,287.61 311.02,279.53 v1(311.02,255.91)
  Bottom Layer w9: v1(311.02,255.91) 312.47,255.91 319.16,262.59 404.48,262.59 416.14,250.94 416.14,221.66 450.79,187.01 U1.26
NetU1_39: U1.39 U3.6 | length 588.2
  Top Layer w9: v1(511.81,-114.17) 511.81,-111.2 516.9,-106.11 516.9,-85.26 U3.6 ; v1(610.24,90.55) 610.24,192.91 653.36,236.04 653.36,299.39 v1(629.92,322.83)
  Signal Layer 2 w9: v1(511.81,-114.17) 535.43,-90.55 535.43,12.77 610.24,87.57 v1(610.24,90.55)
  Bottom Layer w9: v1(629.92,322.83) 641.73,322.83 659.44,305.13 U1.39
NetU1_40: U1.40 U3.7 | length 573.2
  Top Layer w9: U3.7 538.22,-85.26 538.22,-106.11 543.31,-111.2 v1(543.31,-114.17) ; v1(645.67,90.55) 625.98,110.24 625.98,185.04 669.29,228.35 669.29,238.92 669.3,301.85 v1(669.29,322.83)
  Signal Layer 2 w9: v1(543.31,-114.17) 555.12,-102.36 555.12,0 v1(645.67,90.55)
  Bottom Layer w9: v1(669.29,322.83) 669.29,322.32 679.13,312.48 U1.40
NetU6_1: U6.1 U6.4 U9.4 | length 235.6
  Top Layer w9: U6.1@700.79,7.87 700.79,61.5 U9.4 ; U6.1 U6.1@712.6,9.84 ; U6.1@712.6,15.75 U6.1@712.6,9.84 ; U6.4@807.09,-62.99 807.09,-23.62 795.28,-11.81 740.16,-11.81 718.5,9.84 U6.1@712.6,9.84
P1.1: P2.6 U1.1 U9.2 U9.5 | length 387.3
  Top Layer w9: v1(677.17,177.17) 677.17,133.86 708.66,102.36 736.22,102.36 ; U9.5@736.22,74.8 U9.5 736.22,102.36 ; U9.2 736.22,102.36
  Bottom Layer w9: P2.6 704.72,324.8 U1.1@704.72,267.72 ; v1@677.17,181.1 677.17,255.91 687.01,265.75 U1.1
P1.5: P2.7 U1.27 | length 561.9
  Bottom Layer w9: U1.27 458.66,206.69 433.03,232.33 433.03,274.04 392.29,314.78 366.17,314.78 330.71,350.24 330.71,377.95 350.39,397.64 582.68,397.64 P2.7@614.17,366.14
P2.0: P2.8 U1.24 | length 574
  Signal Layer 2 w9: v1(311.02,149.61) 311.02,216.54 338.58,244.09 338.58,287.4 377.95,326.77 527.95,326.77 P2.8
  Bottom Layer w9: v1(311.02,149.61) 312.99,147.64 U1.24
P3.4: P2.9 U1.32 | length 67.7
  Bottom Layer w9: P2.9@519.68,358.27 519.68,351.62 521.65,349.66 U1.32
P3.5: P2.10 U1.31 | length 84.7
  Bottom Layer w9: P2.10@468.5,362.2 501.97,328.74 U1.31
P3.6: P2.11 U1.30 | length 120.9
  Bottom Layer w9: P2.11@417.32,362.2 476.38,303.15 U1.30
P3.7: P2.12 U1.29 | length 173.5
  Bottom Layer w9: P2.12@366.14,358.27 389.93,334.48 402.87,334.48 452.76,284.59 452.76,255.91 462.59,246.07 U1.29
RE: P3.3 R18.2 U4.6 | length 364.5
  Top Layer w9: U4.6@696.85,-193.9 743.11,-193.9 v1(744.09,-192.91)
  Signal Layer 2 w9: v1(744.09,-192.91) 744.09,-177.17 897.67,-23.59 897.67,11.84 P3.3@901.57,15.75
  Bottom Layer w9: R18.2 717.94,-215.13 721.88,-215.13 v1(744.09,-192.91)
RFD: C7.1 P2.5 R2.2 R11.1 U3.5 U3.8 U3.13 U3.16 U4.1 | length 1351.1
  Top Layer w9: R11.1@456.69,-181.1 R11.1 C7.1 452.76,-147.64 458.1,-142.3 460.07,-142.3 460.63,-141.73 v1(511.81,-141.73) ; v1(456.69,62.99) 458.51,61.18 458.51,38.17 467.35,29.33 U3.16 ; 484.25,-137.8 484.25,-110.24 497.22,-97.27 497.22,-85.26 U3.5 ; U3.8 557.9,-85.26 557.9,-97.27 566.93,-106.3 566.93,-133.09 559.06,-140.96 U4.1@559.06,-141.73 ; U3.13 557.09,88.58 v1(559.06,90.55) ; R2.2@704.72,295.28 704.72,345.32 715.35,355.95 P2.5
  Signal Layer 2 w9: 468.5,129.92 480.32,118.11 468.5,106.3 ; v1(543.31,-141.73) v1(511.81,-141.73) 507.87,-141.73 492.13,-125.98 492.13,-51.18 456.69,-15.75 v1(456.69,62.99) 468.5,74.8 468.5,106.3 ; v1(559.06,90.55) 531.5,118.11 468.5,118.11 ; P2.5@716.54,362.2 716.54,307.09 692.91,283.46 496.06,283.46 468.5,255.91 468.5,118.11 ; 468.5,106.3 468.5,118.11
RFS1: RL2.2 U3.1 | length 109.6
  Top Layer w9: v1(433.07,-66.93) 443.28,-56.72 443.28,-5.53 449.97,1.15 469.85,1.15 U3.1
  Bottom Layer w9: v1(433.07,-66.93) 435.04,-68.9 435.04,-76.77 RL2.2
RFS2: RL3.2 U3.12 | length 54.6
  Top Layer w9: U3.12 624.02,1.97 628.52,-2.53 630.48,-2.53 633.86,-5.91 RL3.2@633.86,-7.87
RFS3: RL4.2 U3.9 | length 27.4
  Top Layer w9: v1(578.74,-78.74) 578.74,-59.06 580.13,-60.45 583.49,-57.09 U3.9
RFS4: RL5.2 U3.4 | length 19
  Top Layer w9: U3.4 471.63,-57.09 472.44,-57.9 v1(472.44,-74.8)
RST: R1.1 SBW.2 U1.4 | length 313.8
  Top Layer w9: R1.1@846.46,137.8 848.43,137.8 849.83,139.2 849.83,141.17 884.25,175.59 SBW.2
  Bottom Layer w9: U1.4 753.94,206.69 787.4,173.23 913.39,173.23 SBW.2@917.32,169.29
RXD: U1.18 UART.1 | length 615.3
  Signal Layer 2 w9: UART.1 230.21,-291.44 230.21,-242.22 280.59,-191.84 280.59,-158.55 255.06,-133.02 255.06,-83.52 v1(279.53,-59.06)
  Bottom Layer w9: v1(279.53,-59.06) 279.53,-32.61 319.52,7.38 363.65,7.38 395.65,39.37 531.5,39.37 541.33,49.2 U1.18
TEST: SBW.3 U1.3 | length 235.6
  Bottom Layer w9: U1.3 757.87,226.38 791.34,192.91 862.2,192.91 890.65,221.36 910.34,221.36 SBW.3@913.39,224.41
TXD: U1.17 UART.2 | length 581.1
  Signal Layer 2 w9: UART.2 276.38,-223.99 300.4,-199.97 300.4,-138.98 279.53,-118.11 v1(279.53,-86.61)
  Bottom Layer w9: v1(279.53,-86.61) 282.07,-86.61 311.01,-57.67 352.9,-15.78 374.26,-15.78 409.73,19.69 535.43,19.69 561.02,45.28 U1.17
V1.25: C8.2 R9.1 R10.1 U5.1 U6.3 | length 1602.2
  Top Layer w9: U6.3 712.4,-59.06 748.03,-59.06 775.59,-86.61 846.46,-86.61 893.7,-39.37 v1(917.32,-39.37)
  Signal Layer 2 w9: v1(196.85,-240.16) 188.98,-248.03 188.98,-318.9 196.85,-326.77 929.13,-326.77 948.82,-307.09 948.82,-70.87 v1(917.32,-39.37)
  Bottom Layer w9: R9.1@169.29,-157.48 157.48,-157.48 145.67,-169.29 145.67,-208.66 165.92,-228.91 167.89,-228.91 173.23,-234.25 R10.1 ; R9.1 C8.2@173.23,-102.36 ; R10.1@177.17,-236.22 202.76,-236.22 209.22,-229.75 209.22,-221.88 216.54,-214.57 U5.1
VCC: C1.1 P1.5 R1.2 SBW.4 U1.5 U2.2 U2.6 U7.6 U8.1 | length 3564.3
  Top Layer w9: U8.1 v1(139.17,242.72) ; v1(393.7,-55.12) 425.2,-23.62 U7.6 ; C1.1@708.66,204.72 710.63,204.72 712.04,203.32 728.35,203.32 ; v1(729.48,186.27) 728.35,187.4 728.35,203.32 ; R1.2@846.46,90.55 937.01,90.55 948.82,102.36 948.82,242.13 SBW.4@917.32,273.62 ; SBW.4@917.32,271.65 SBW.4@917.32,273.62 ; 728.35,203.32 728.35,318.9 740.16,330.71 901.57,330.71 917.32,314.96 SBW.4@917.32,273.62
  Signal Layer 2 w9: v1(139.17,242.72) 114.17,267.72 114.17,347.69 168.05,401.57 326.77,401.57 ; 314.96,401.57 326.77,389.76 338.58,401.57 ; v1(393.7,-55.12) 417.32,-31.5 417.32,15.75 405.51,27.56 311.02,27.56 283.46,55.12 283.46,271.65 326.77,314.96 326.77,401.57 ; v1(846.46,-39.37) 866.14,-19.69 866.14,224.41 SBW.4@913.39,271.65 ; SBW.4@921.26,275.59 927.07,281.4 934.94,281.4 948.82,295.28 948.82,385.83 933.07,401.57 326.77,401.57
  Bottom Layer w9: v1@390.95,-56.3 342.46,-56.3 289.58,-109.18 289.58,-222.65 317.71,-250.78 412.2,-250.78 425.2,-263.78 533.86,-263.78 P1.5 ; U1.5 728.75,187 v1(729.48,186.27) ; U2.2 791.34,-99.38 814.27,-76.45 814.27,-67.62 U2.6@815.86,-66.03 ; U2.6 816.93,-42.74 820.3,-39.37 v1(846.46,-39.37)
VOUT: NCS1.3 P2.3 R11.2 R13.1 | length 1016.2
  Top Layer w9: R13.1@413.39,-216.54 R11.2
  Signal Layer 2 w9: v1(673.23,-248.03) 703.88,-217.38 703.88,-91.4 795.28,0 v1(795.28,228.35)
  Bottom Layer w9: v1(413.39,-220.47) 440.94,-192.91 487.07,-192.91 491,-196.85 577.38,-196.85 628.56,-248.03 v1(673.23,-248.03) ; v1(795.28,228.35) 795.28,259.84 771.65,283.46 771.65,320.47 P2.3
VREF+: P1.1 U1.25 | length 911.2
  Signal Layer 2 w9: v1(239.46,-66.93) 267.02,-39.37 295.28,-39.37 338.05,-82.14 338.05,-185.57 306.37,-217.25 306.37,-298.5 315.94,-308.07 352.56,-308.07 P1.1
  Bottom Layer w9: v1(239.46,-66.93) 240.16,-66.24 240.16,-22.67 275.59,12.77 275.59,157.48 291.52,173.41 326.59,173.41 338.58,161.42 437.01,161.42 442.91,167.32 494.09,167.32 v1(503.94,157.48)
VSENSOR: C4.1 NCS1.5 P1.10 R5.1 R9.2 U3.11 U4.8 U6.5 U10.6 U11.8 | length 2012.6
  Top Layer w9: U11.8 v1(196.85,-181.1) ; U3.11 585.26,-18.53 604.96,-18.53 610.24,-23.8 610.24,-122.05 633.74,-145.55 638.91,-145.55 v1(641.01,-147.66) 643.22,-147.66 649.15,-141.73 665.25,-141.73 665.55,-142.03 676.86,-142.03 U4.8@677.17,-141.73 ; U4.8@708.66,-141.73 709.15,-142.22 739.67,-142.22 v1(740.16,-141.73) ; U6.5 816.93,9.84 v1(838.58,-11.81)
  Signal Layer 2 w9: v1@196.85,-177.17 196.85,-70.87 263.86,-3.86 343.72,-3.86 373.73,-33.87 373.73,-61.99 456.69,-144.96 456.69,-220.47 468.5,-232.28 487.1,-232.28 550.72,-168.66 606.93,-168.66 627.93,-147.66 v1(641.01,-147.66) ; P1.10 724.5,-204.42 724.5,-157.39 v1(740.16,-141.73) 818.91,-62.98 818.91,-31.49 v1(838.58,-11.81) 850.39,0 v1(850.39,303.15)
  Bottom Layer w9: R9.2 175.2,-196.85 180.54,-191.51 180.54,-189.54 188.98,-181.1 v1(196.85,-181.1) ; U10.6 715.63,-53.82 715.63,-81.77 740.16,-106.3 v1@740.16,-137.8 ; v1(740.16,-141.73) 741.87,-143.44 741.87,-155.25 771.65,-185.04 R5.1@771.65,-188.98 ; C4.1 R5.1 ; NCS1.5 v1(850.39,303.15)
WE: P3.2 RL1.1 | length 829.7
  Top Layer w9: v1(362.2,-78.74) 417.32,-78.74 445.44,-106.86 447.41,-106.86 452.76,-112.2 RL1.1
  Signal Layer 1 w9: v1(629.92,-177.17) 695.42,-177.17 710.05,-162.54 779.45,-162.54 853.41,-88.58 P3.2
  Signal Layer 2 w9: v1(362.2,-78.74) 383.07,-99.61 393.7,-110.24 433.73,-150.27 433.73,-225.07 456.69,-248.03 500.7,-248.03 559.64,-189.09 618,-189.09 v1(629.92,-177.17)
WEOUT: RL1.2 U11.10 | length 610.4
  Top Layer w9: U11.10 156.07,-220.47 157.48,-221.88 157.48,-257.87 149.61,-265.75 104.33,-265.75 102.36,-263.78 74.8,-236.22 74.8,-129.92 105.04,-99.68 130.06,-99.68 130.13,-99.61 145.46,-99.61 145.53,-99.68 148.73,-99.68 154.53,-105.47 297.5,-105.47 303.42,-99.55 398.76,-99.55 406.07,-106.86 408.04,-106.86 413.39,-112.2 RL1.2
WRK: P1.12 R10.2 R12.1 U11.6 | length 1043.2
  Top Layer w9: v1(133.86,-244.09) 111.57,-244.09 106.3,-238.82 106.3,-149.61 114.17,-141.73 U11.6
  Bottom Layer w9: R10.2 v1(133.86,-244.09) R12.1 133.86,-311.02 149.61,-326.77 883.86,-326.77 P1.12
XIN: C3.1 U1.7 Y1.1 | length 109
  Bottom Layer w9: U1.7 711.99,147.64 712.02,146.64 748.59,110.06 748.59,103.77 750,102.36 C3.1@755.91,102.36 ; C3.1 779.53,98.43 Y1.1@787.4,106.3
XOUT: C2.1 U1.8 Y1.2 | length 143
  Bottom Layer w9: U1.8 710.76,127.94 728.35,110.35 728.35,86.61 748.59,66.37 748.59,54.56 C2.1@751.97,51.18 ; C2.1@759.84,55.12 C2.1 756.26,50.83 759.84,50.83 775.94,50.83 784.03,42.74 784.03,40.78 785.43,39.37 Y1.2@787.4,39.37
pads on no net: U1.22 U1.35 U1.36 U1.38 U2.5 U3.2 U3.10 U5.3 U10.5 U11.7

## Polygon pours and split planes (outlines as drawn)
GND on Signal Layer 1 "GND" (hatched 90Degree grid 8 track 8.1, remove dead copper, pour order 0): -2.24,135.6 71.42,211.15 71.42,435.98 157.86,400.52 956.69,400.52 956.69,-320.22 138.51,-320.22 71.42,-347.74 71.42,9.69 -2.24,85.24 -2.24,106.1

## Other copper
Top Layer:
  rectangle net GND: -35.61,90.39 3.76,2922.15
  region net NetQ2_2: 3.13,-19.61 -36.24,-19.61 -36.24,-2851.37 3.13,-2851.37
  region net NetQ2_2: 28.76,-60.11 58.76,-17.89 58.76,24.89 13.76,24.89 -28.24,-6.11 -36.17,-21.35 -26.11,-64.94 -21.24,-69.11 -3.24,-75.11 14.76,-71.11
  region net GND: 28.76,130.39 58.76,88.16 58.76,45.39 13.76,45.39 -15.43,66.93 -34.41,103.44 -27.32,134.18 -21.24,139.39 -3.24,145.39 14.76,141.39
Signal Layer 1:
  region net GND: 72.76,3.9 -2.24,78.9 -2.24,143.24 72.76,218.24
Bottom Layer:
  region net NetQ2_2: 28.76,-60.11 58.76,-17.89 58.76,24.89 13.76,24.89 -28.24,-6.11 -41.24,-31.11 -35.24,-57.11 -21.24,-69.11 -3.24,-75.11 14.76,-71.11
  region net GND: 28.76,130.39 58.76,88.16 58.76,45.39 13.76,45.39 -28.24,76.39 -41.24,101.39 -35.24,127.39 -21.24,139.39 -3.24,145.39 14.76,141.39

## Silkscreen, mask and mechanical layers (free items; w line width, h text height)
Top Overlay:
  lines w5: -16.27,-313.37 -44.46,-313.37 -44.46,-352.74 -15.75,-352.74 -15.75,-340.64 ; 66.93,-102.36 -35.43,-102.36 -35.43,-251.82 66.93,-251.82 66.93,-66.93 271.65,-66.93 271.65,-94.49 393.7,-94.49 ; 366.14,-259.84 366.14,-196.85 ; 452.76,216.54 452.81,216.59 ; 456.69,145.67 464.96,145.67 464.96,90.95 465.36,90.55 476.38,90.55 ; 488.19,161.42 488.19,169.29 ; 586.61,31.5 586.61,51.18 ; 614.62,-121.6 614.62,-110.24 ; 654.56,152.53 685.04,152.53 ; 661.42,-102.36 677.17,-102.36 ; 673.23,314.96 740.16,314.96 ; 681.32,152.53 741.14,152.53 741.14,167.32 ; 748.03,-240.16 748.03,-248.03 846.46,-248.03 854.33,-240.16 862.2,-240.16 ; 765.23,-140.14 737.03,-140.14 737.03,-179.51 765.75,-179.51 765.75,-167.41 ; 765.75,-118.11 765.75,-235.12 840.55,-235.12 840.55,-153.54 840.55,-88.58 772.51,-88.58 765.75,-95.34 765.75,-102.36 ; 811.02,69.85 888.75,69.85 916.31,69.85 916.31,89.21 ; 838.58,283.46 838.58,291.34 ; 35.43,248.03 35.43,283.46 35.43,295.28 78.74,295.28 ; 35.43,248.03 78.74,248.03 78.74,295.28 ; 35.43,248.03 -39.37,248.03 -39.37,409.45 18,409.45 114.17,409.45 114.17,366.14 114.17,358.27 78.74,358.27 78.74,295.28 ; 393.7,-94.49 393.7,-244.09 480.32,-244.09 480.32,-94.49 393.7,-94.49 ; -15.75,-408.35 -15.75,-291.34 -15.75,-261.81 59.06,-261.81 59.06,-326.77 59.06,-407.48 59.92,-408.35 -15.75,-408.35 ; 241.84,-51.18 241.84,307.09 241.84,318.9 547.27,318.9 547.27,249.45 476.38,249.45 476.38,204.72 377.95,204.72 377.95,78.74 377.95,-47.24 425.11,-47.24 425.11,-84.71 396.45,-84.71 377.95,-84.71 279.53,-84.71 279.53,-51.18 241.84,-51.18
  text "B" at 46.06,250.72 h24
  text "B" at 392.3,-82.63 h24
  text "A" at 735.54,-177.48 h24
  text "A" at -45.95,-350.71 h24
Mechanical 1:
  lines w10: -53.24,2910.06 -53.24,1472.56 -53.24,-2839.94 ccw(c-15.74,-2842.44) 21.76,-2839.94 21.76,-514.87 cw(c191.05,-514.87) 191.05,-345.58 ; 21.76,2910.06 21.76,585.06 ccw(c191.05,585.06) 191.05,415.77 ; 191.05,-345.94 964.57,-345.94 964.57,416.06 191.05,416.06
  lines w15: -53.24,2910.06 cw(c-15.74,2912.56) 21.76,2910.06